# EAGLE board 900mhz-antenna (EAGLE 9.6.2)
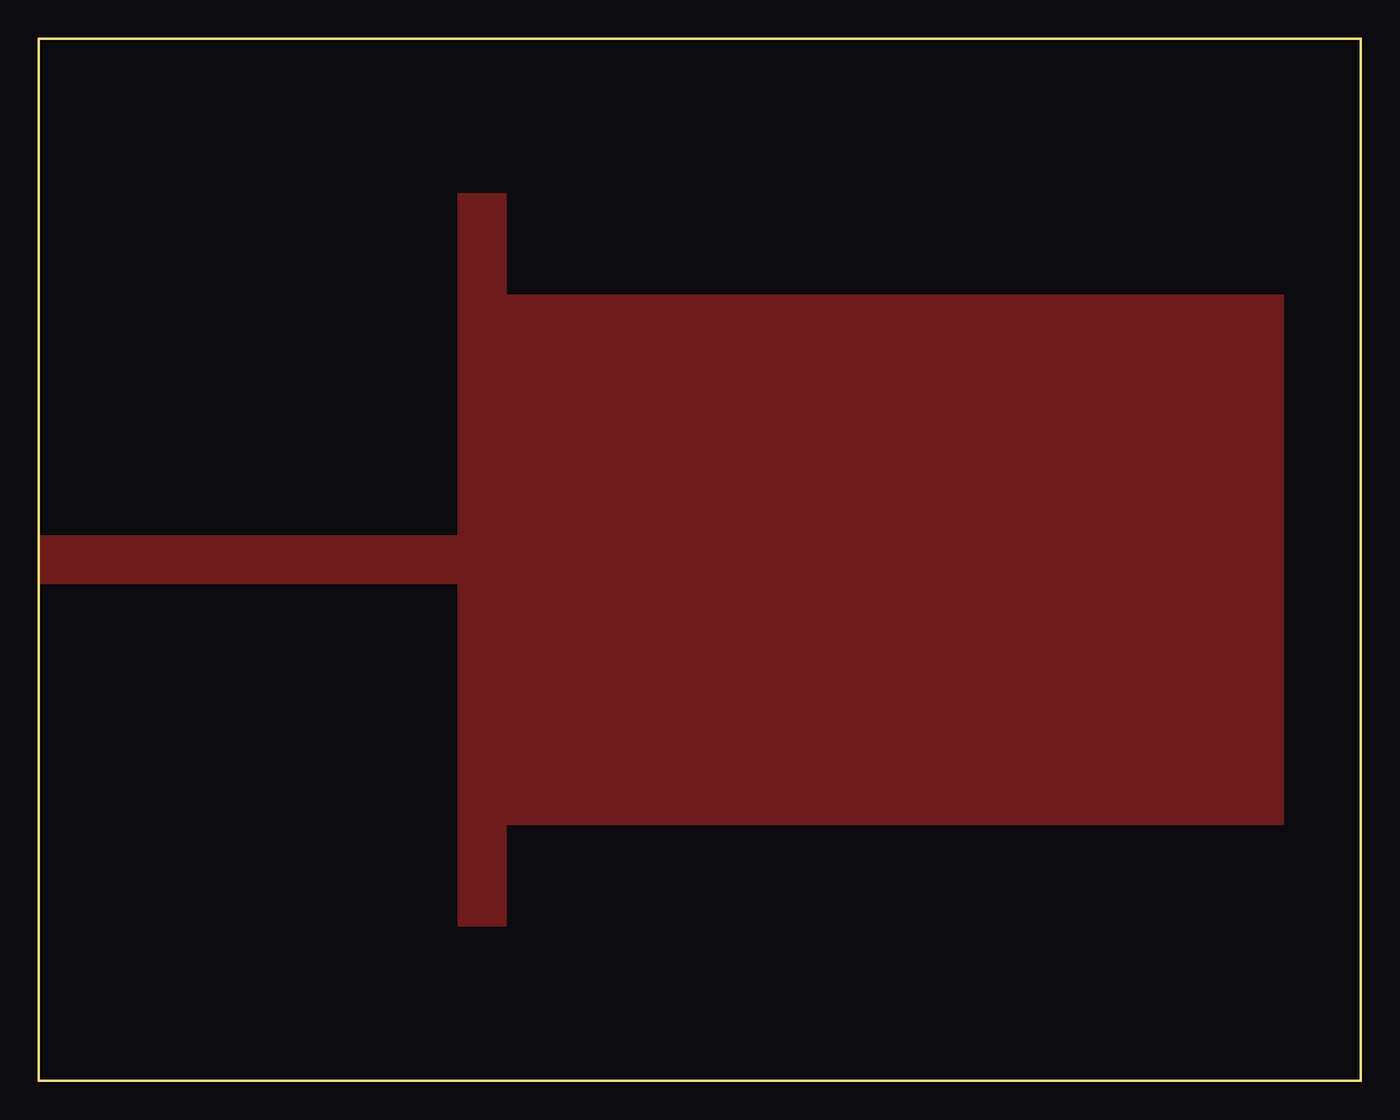
[diagram p0: board, top side]
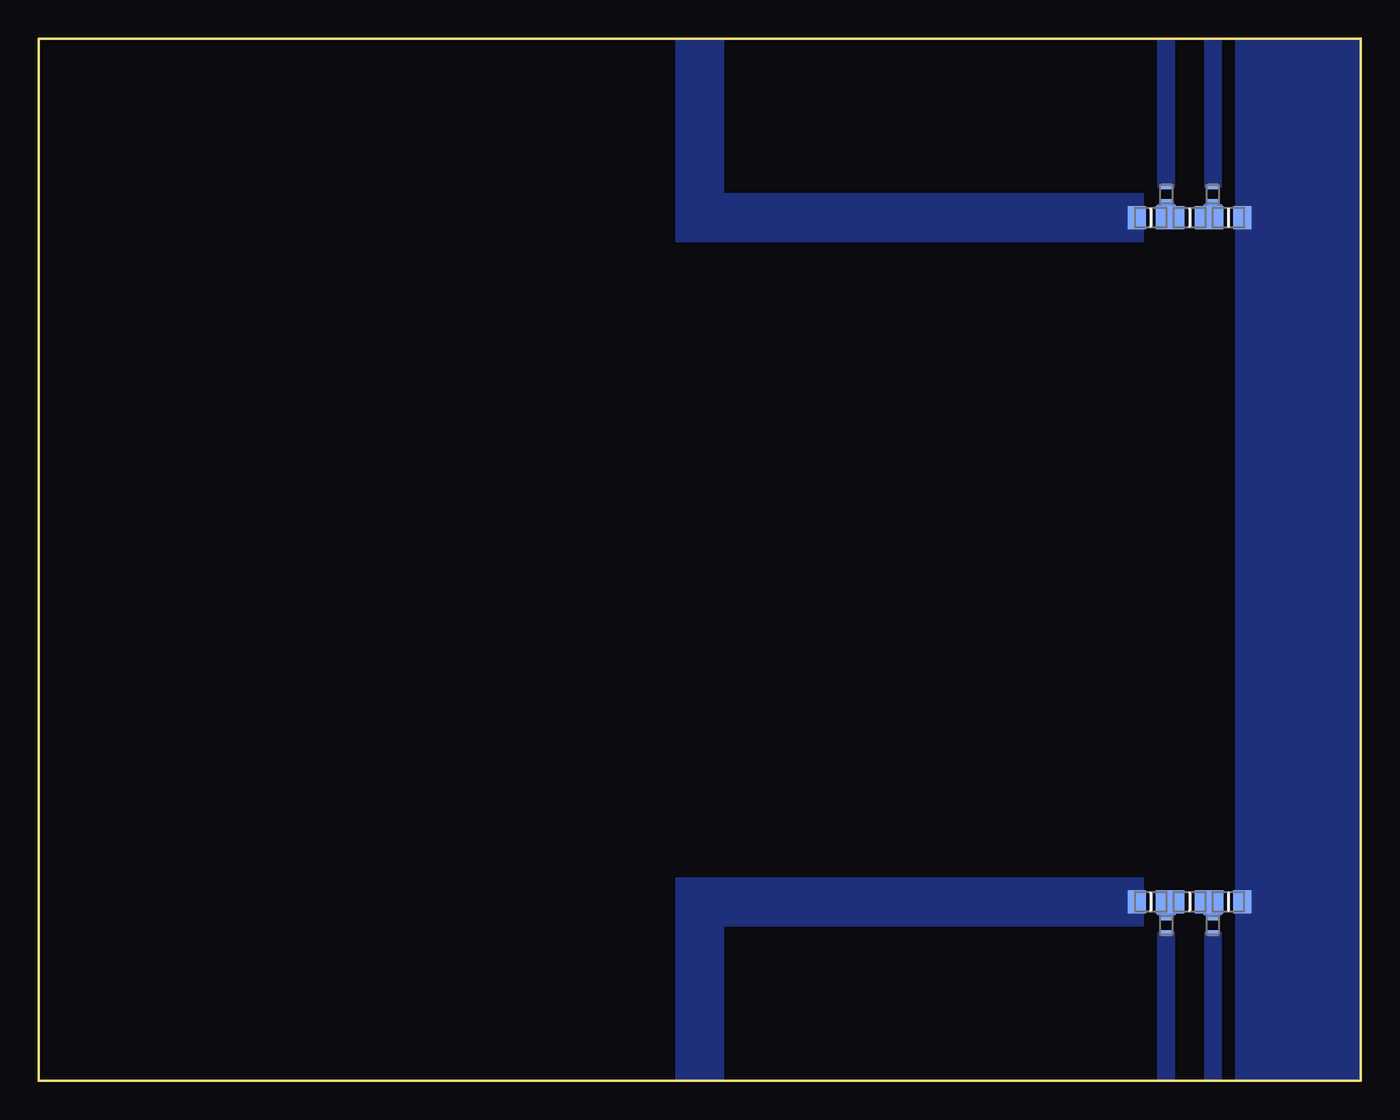
[diagram p1: board, bottom side, seen from below]

Size 85 x 67 mm. Coordinates in mm from the lower left corner, seen from the top.
Outline: 0,0 0,67 85,67 85,0 0,0
Copper layers (1*16): Top 0.035mm / dielectric 1.5mm / Bottom 0.035mm
Design rules "default *": minimum track width 6mil, minimum drill 0.35mm, track to track 0mil, track to pad 0mil, pad to pad 0mil, via to via 0mil, smd to smd 0mil, copper to edge 0mil, drill to drill 6mil, minimum pad ring 10mil, minimum via ring 8mil, stop-mask expansion 4mil, vias tented up to drill 0mil, thermal gap 10mil

## Footprints (pad centres in the part's own frame; a part is rotated, then mirrored left to right if it is on the bottom)
CAPC2012X140N = smd 1.15 x 1.45: 1 -0.9,0; 2 0.9,0
IND_0402HL-821XJRU = smd 0.36 x 0.66: 1 -0.5,0; 2 0.5,0

## Placement (x,y rotation side)
C1  08055K470JBTTR  [CAPC2012X140N]  8.5,11.5 0 bottom
C2  08055K470JBTTR  [CAPC2012X140N]  13.5,11.5 0 bottom
C3  08055K470JBTTR  [CAPC2012X140N]  11,11.5 0 bottom
C4  08055K470JBTTR  [CAPC2012X140N]  8.5,55.5 0 bottom
C5  08055K470JBTTR  [CAPC2012X140N]  13.5,55.5 0 bottom
C6  08055K470JBTTR  [CAPC2012X140N]  11,55.5 0 bottom
L1  0402HPH-R12XGLU  [IND_0402HL-821XJRU]  9.5,10 90 bottom
L2  0402HPH-R12XGLU  [IND_0402HL-821XJRU]  12.5,10 90 bottom
L3  0402HPH-R12XGLU  [IND_0402HL-821XJRU]  12.5,57 270 bottom
L4  0402HPH-R12XGLU  [IND_0402HL-821XJRU]  9.5,57 270 bottom

## Library data of the parts
C1-C6 = 08055K470JBTTR; AVAILABILITY: In Stock; DESCRIPTION: 47 pF Thin Film Capacitor 50 V 0805 (2012 Metric); MF: AVX; MP: 08055K470JBTTR; PACKAGE: 0805 AVX; PRICE: None
L1-L4 = 0402HPH-R12XGLU; AVAILABILITY: In Stock; DESCRIPTION: RF inductor, ceramic core, 2% tol, SMT, RoHS; MF: Coilcraft; MP: 0402HPH-R12XGLU; PACKAGE: 0402 Coilcraft; PRICE: None; PURCHASE-URL: https://pricing.snapeda.com/search/part/0402HPH-R12XGLU/?ref=eda

## Tracks (layer width: path | path; a pad name or v marks a point on that pad's centre or on a via)
CTRL3
  pour Bottom: 9,67 10,67 10,57.5 9,57.5
CTRL4
  pour Bottom: 12,67 13,67 13,57.5 12,57.5
CTRL5
  pour Bottom: 9,9.5 10,9.5 10,0 9,0
CTRL6
  pour Bottom: 12,9.5 13,9.5 13,0 12,0
GROUND3_1
  pour Bottom: 14,10 44,10 44,13 14,13
GROUND3_2
  pour Bottom: 41,10 44,10 44,0 41,0
GROUND3_11
  pour Bottom: 14,54 44,54 44,57 14,57
  pour Bottom: 0,67 8,67 8,0 0,0
GROUND3_21
  pour Bottom: 41,67 44,67 44,57 41,57
N$1
  Bottom 0.254: 9,10.75 10,10.75
N$2
  Bottom 0.254: 12,10.75 13,10.75
N$3
  Bottom 0.254: 9,56.25 10,56.25
N$4
  Bottom 0.254: 12,56.25 13,56.25
PATCH1
  pour Top: 0,35 0,32 27,32 27,35
PATCH2
  pour Top: 27,57 30,57 30,10 27,10
PATCH3
  pour Top: 30,16.5 30,50.5 80,50.5 80,16.5